# Altium PCB ALINX9226结构图.PcbDoc
Units mil, origin at the board's own origin, x right, y up, seen from the top; angles counter-clockwise.
Board outline 3191.61 x 2015 mil, 4 copper layers (TopLayer, D3V3, GND, BottomLayer); 3 components, 81 nets, 52 pads, 0 vias.
Unrouted connection lines stored in the file: 7.
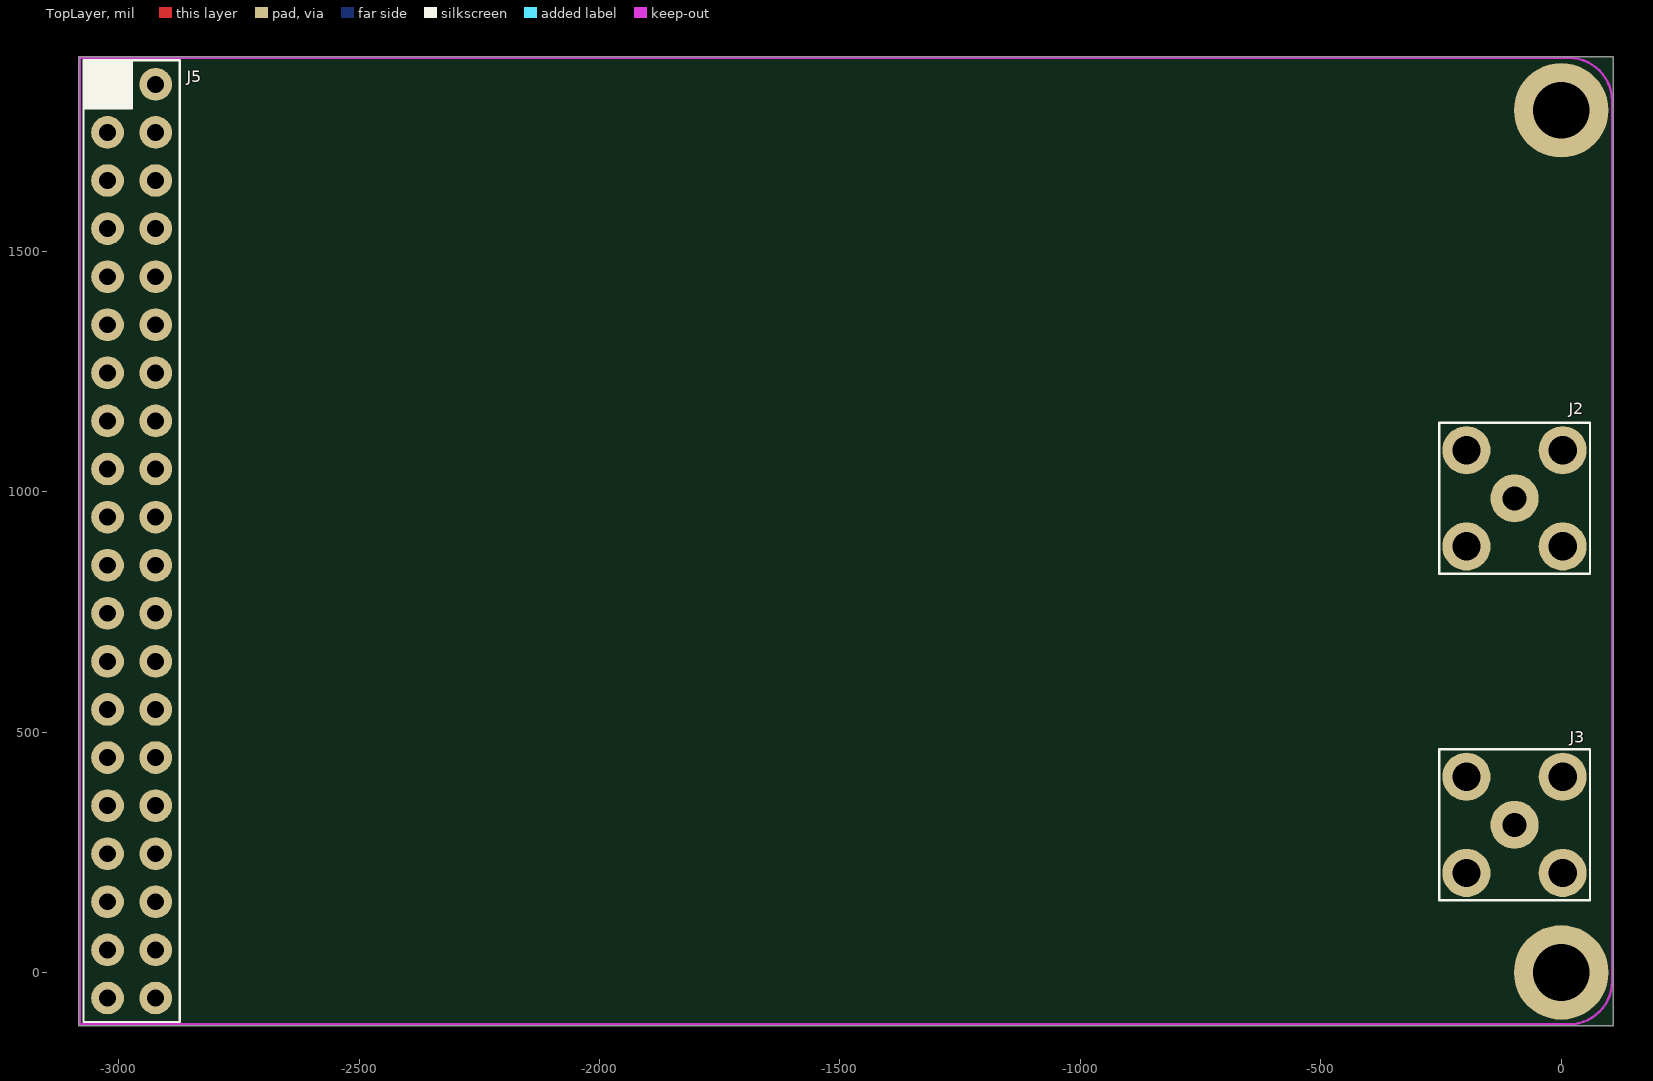
[diagram p0: TopLayer view]
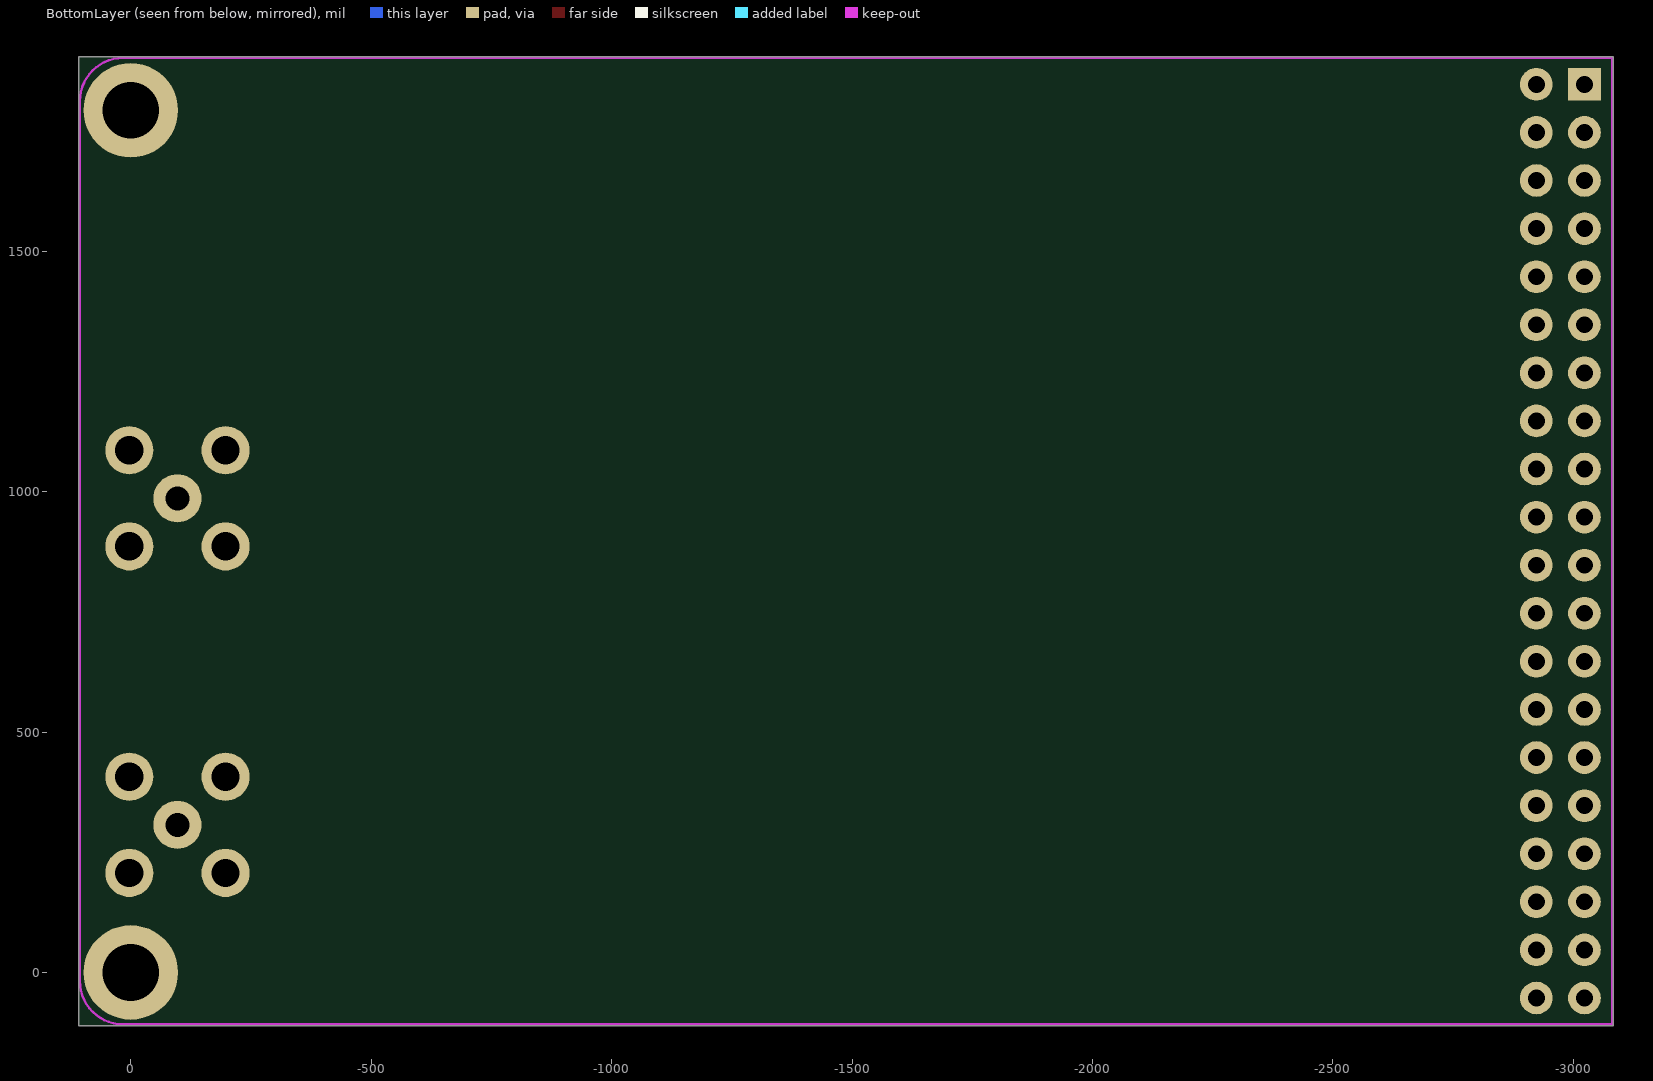
[diagram p1: BottomLayer view, seen from below]
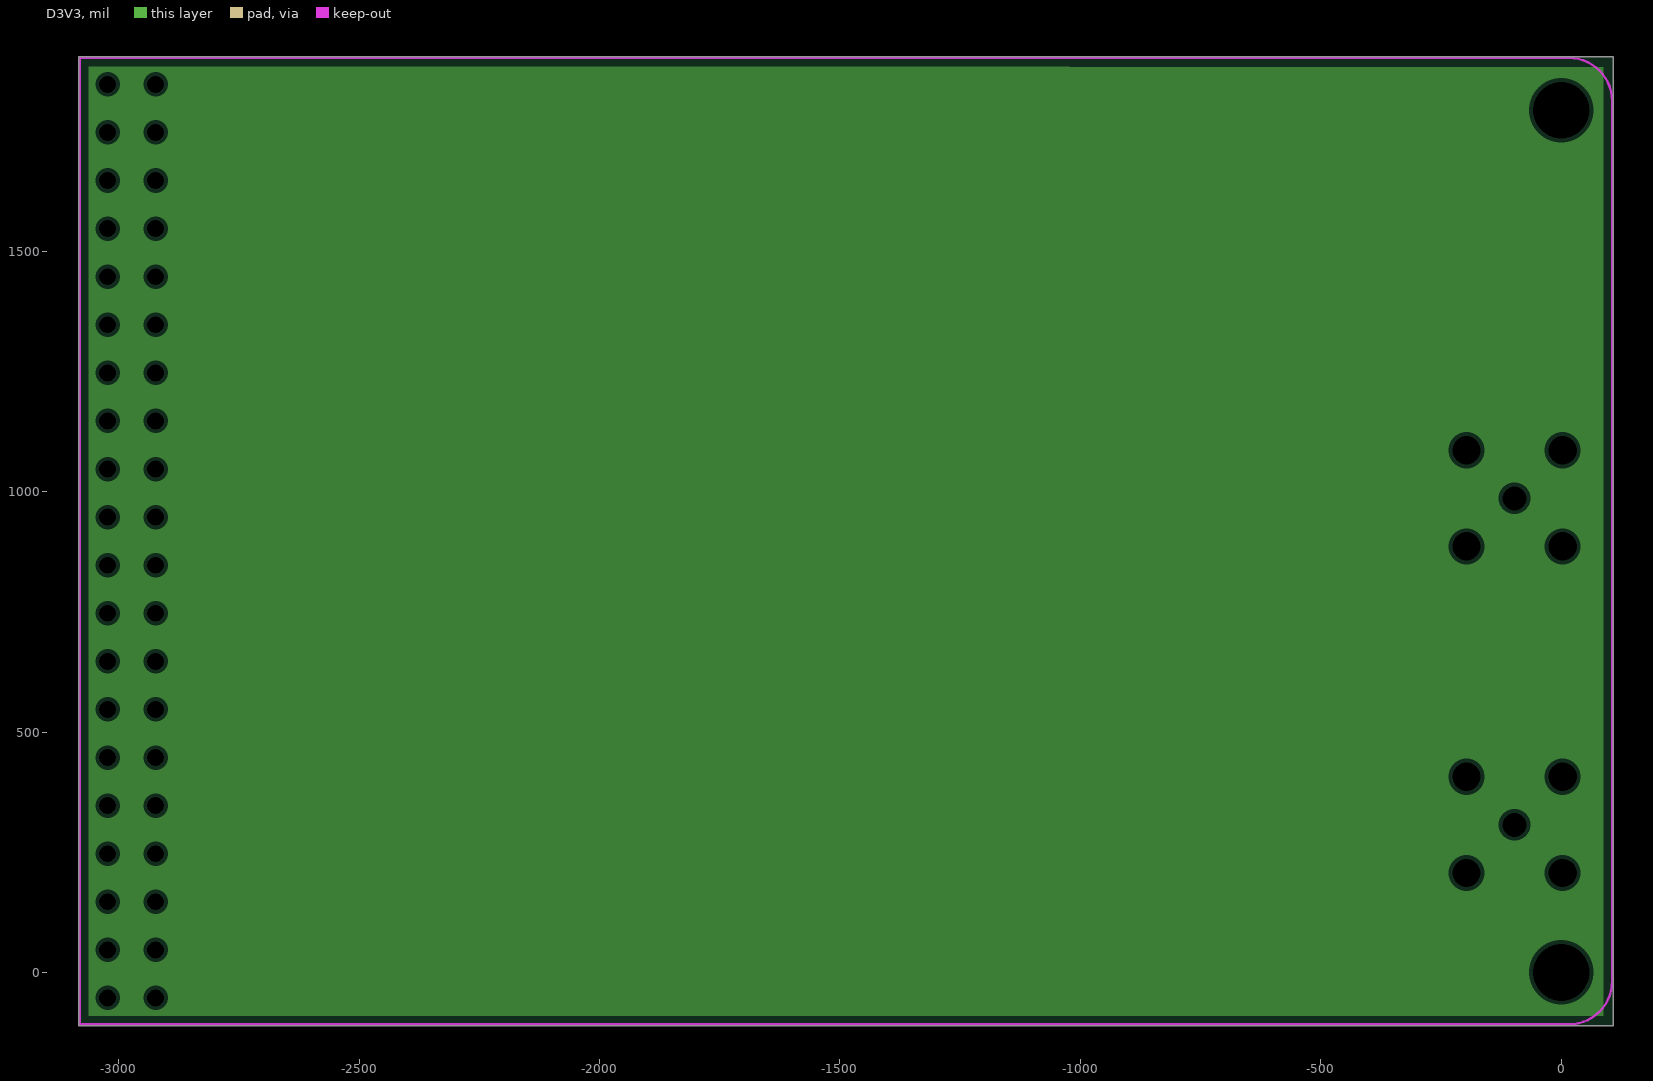
[diagram p2: D3V3, clearances drawn from the general rule]
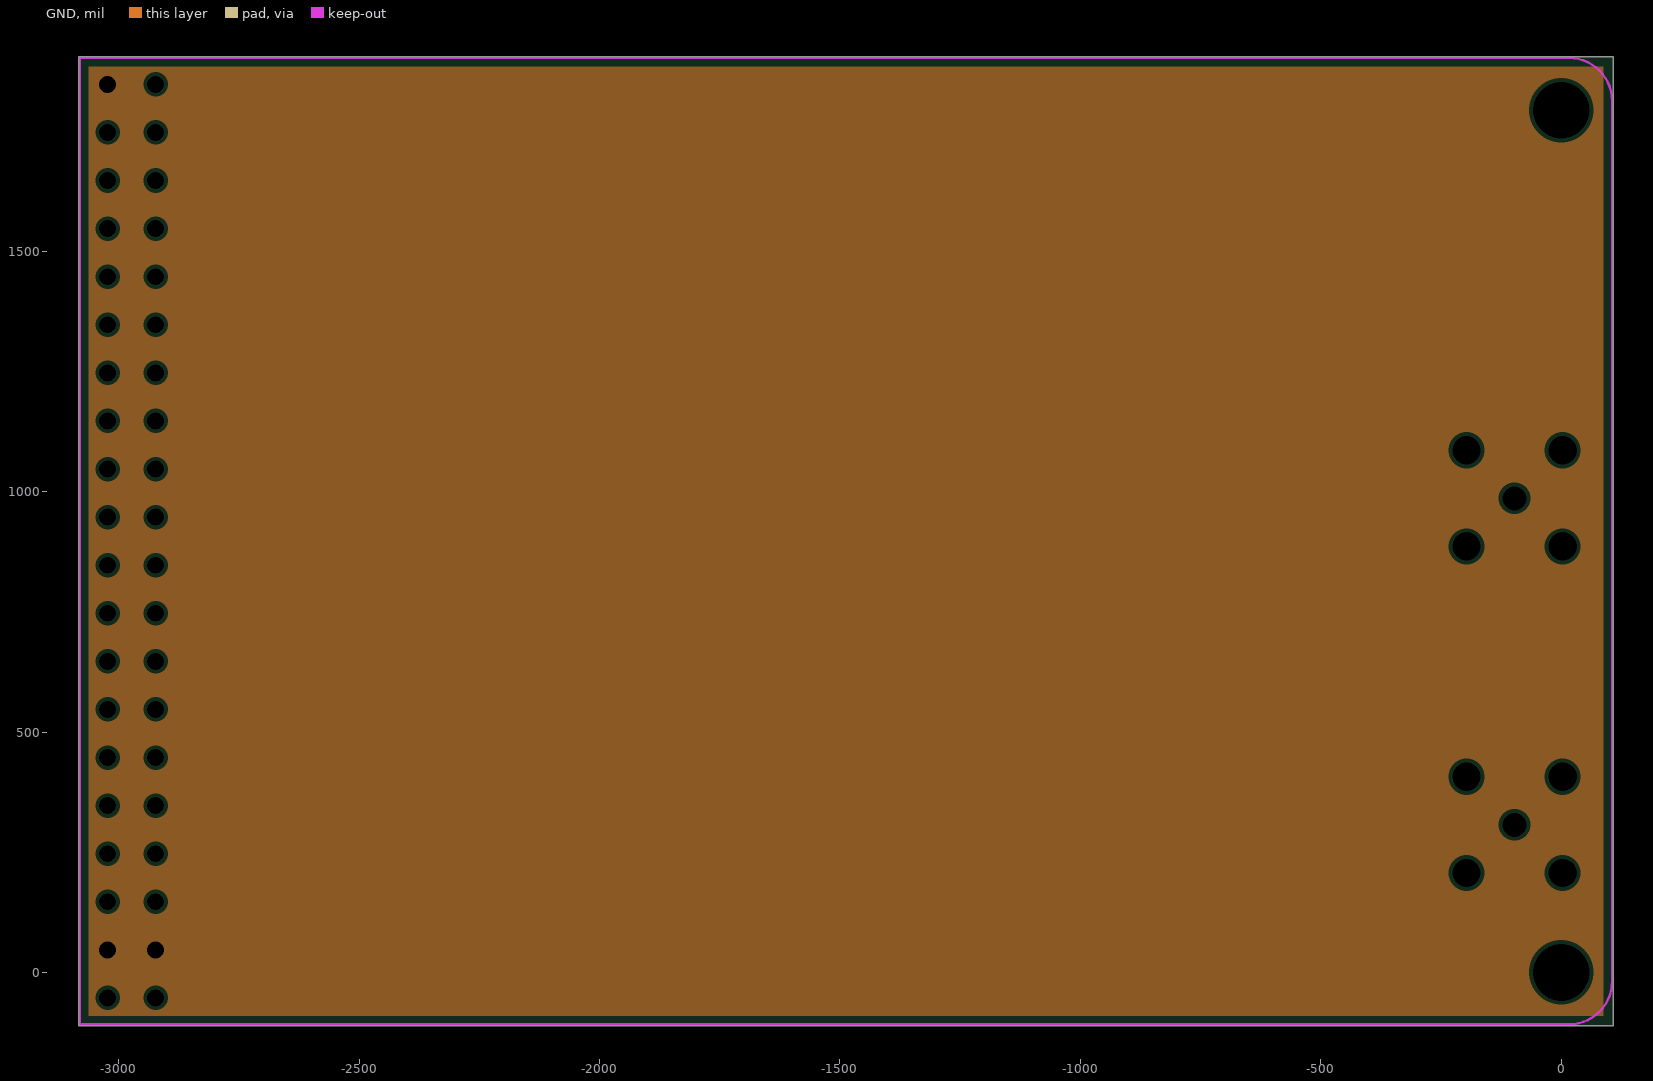
[diagram p3: GND, clearances drawn from the general rule]

## Layer stack, top to bottom
TopLayer: signal copper 1.4
Dielectric: core 12.6, FR-4, Dk 4.8
D3V3: plane copper 1.4, net (Multiple Nets)
Dielectric: prepreg 12.6, FR-4, Dk 4.8
GND: plane copper 1.4, net (Multiple Nets)
Dielectric: core 12.6, FR-4, Dk 4.8
BottomLayer: signal copper 1.4

## Board outline
-3083.11,-110.4 108.5,-110.4 108.5,1904.6 -3083.11,1904.6

## Design rules (kind name [scope] priority, off if disabled: settings)
Clearance [All] p1: gap=8
FabricationTestPointUsage TestPointUsage [All] p1: valid=0 allowmultiple=FALSE
FabricationTestpoint Testpoint [All] p1: side=3 testpointundercomponent=TRUE minsize=40 maxsize=100 preferedsize=60 minholesize=20 maxholesize=40 preferedholesize=32 testpointgrid=1 allowsidetop=TRUE allowsidebottom=TRUE usegrid=TRUE gridtolerance=0.01
HoleSize [All] p1: absolutevalues=TRUE maxlimit=200 minlimit=1 maxpercent=80.000 minpercent=20.000
PlaneClearance [All] p1: clearance=8
PlaneConnect [All] p1: planeconnectstyle=Relief reliefexpansion=6 reliefentries=4 reliefconductorwidth=6 reliefairgap=5
PolygonConnect [All] p1: connectstyle=Relief reliefconductorwidth=10 reliefentries=4 polygonreliefangle="90 Angle"
RoutingVias [All] p1: holewidth=20 width=40 viastyle="Through Hole" minholewidth=15 minwidth=30 maxholewidth=50 maxwidth=100
SilkscreenOverComponentPads [All] p1: minsilkscreentomaskgap=10
SolderMaskExpansion [All] p1: expansion=4
Width [All] p1: maxlimit=60 minlimit=5 preferedwidth=40
22 further rules are at their usual default settings.

## Components (designator, comment, footprint, x,y, rotation, side; value= is the part's Value field where it differs from the comment)
J2 "ADCIN1" BNC_3 -97,986 r90 top
J3 "ADCIN2" BNC_3 -97,307 r90 top
J5 "IDC40" IDC40 -3023,1847 r270 top

## Footprints (in the part's own frame and the unit in brackets; to place one, negate y for a bottom-side part, rotate by r counter-clockwise, add the part's x,y. Pads: shape width x height; smd on the part's side, far side on the other; paste and mask are expansions set on the pad)
BNC_3 [mm]
  round 2.54 hole 1.27: 1(0,0)
  round 2.54 hole 1.5: 2(-2.54,-2.54) 2(-2.54,2.54) 2(2.54,-2.54) 2(2.54,2.54)
  silkscreen extent -3.99,-3.99 3.99,3.99
IDC40 [mil]
  rect 68x68 hole 35: 1(0,0)
  round 68 hole 35: 2(0,100) 3(100,0) 4(100,100) 5(200,0) 6(200,100) 7(300,0) 8(300,100) 9(400,0) 10(400,100) 11(500,0) 12(500,100) 13(600,0) 14(600,100) 15(700,0) 16(700,100) 17(800,0) 18(800,100) 19(900,0) 20(900,100) 21(1000,0) 22(1000,100) 23(1100,0) 24(1100,100) 25(1200,0) 26(1200,100) 27(1300,0) 28(1300,100) 29(1400,0) 30(1400,100) 31(1500,0) 32(1500,100) 33(1600,0) 34(1600,100) 35(1700,0) 36(1700,100) 37(1800,0) 38(1800,100) 39(1900,0) 40(1900,100)
  silkscreen extent -50,-50 1950,150

## Free pads (board coordinates)
  round 196.85 hole 118.11: 1(0,0) 2(0,1793)

## Nets (pads, with @x,y where several pads share a name; then routed paths per layer and width w, separated by ;. In a path a pad name is that pad's centre, name@x,y a point inside that pad or via, vN(x,y) a via of type N, cw(c..) or ccw(c..) an arc to the next point about the centre after c; other vN are vias at no path point)
+5V: 
+5VA: 
+5VB: 
-5V: 
-5VA: 
-5VB: 
AD1_OTR: J5.15
AD1CLK: J5.4
AD1DB0: J5.16
AD1DB1: J5.13
AD1DB2: J5.14
AD1DB3: J5.11
AD1DB4: J5.12
AD1DB5: J5.9
AD1DB6: J5.10
AD1DB7: J5.7
AD1DB8: J5.8
AD1DB9: J5.5
AD1DB10: J5.6
AD1DB11: J5.3
AD2_OTR: J5.29
AD2CLK: J5.18
AD2DB0: J5.30
AD2DB1: J5.27
AD2DB2: J5.28
AD2DB3: J5.25
AD2DB4: J5.26
AD2DB5: J5.23
AD2DB6: J5.24
AD2DB7: J5.21
AD2DB8: J5.22
AD2DB9: J5.19
AD2DB10: J5.20
AD2DB11: J5.17
ADIN1: 
ADIN2: 
AGND0: 
AGND1: J2.2
AGND2: J3.2
AIN1: 
AIN2: 
D3V3: 
D3V3A: J5.39 J5.40
GND: J5.1 J5.37 J5.38
N16213017: 
N16213301: 
N16213337: 
N16213393: 
N16213429: 
N16224615: 
N16224700: 
N16224819: 
N16225671: 
N16356819: 
N16356841: 
N16365064: 
N16365120: 
N16365174: 
N16365270: 
N16365640: 
N16365660: 
N16380312: J5.32
N16380334: J5.31
N16380338: J5.33
N16380342: J5.34
N16380346: J5.35
N16380350: J5.36
N16381253: 
N16394429: J3.1
N16394924: J2.1
N16411987: 
N16412048: 
N16413321: 
N16413593: 
N1622282215: 
N1640152915: 
NREF1: 
NREF2: 
VCC: J5.2
VREF1: 
VREF2: 

## Polygon pours and split planes (outlines as drawn)
D3V3 on D3V3 (split plane): -1023.78,1884.45 -1021.96,1883.69 -1020,1883.44 88.4,1883.44 88.4,-90.3 -3063.01,-90.3 -3063.01,1884.51 -1023.86,1884.51
GND on GND (split plane): 88.4,-90.3 -3063.01,-90.3 -3063.01,1884.51 88.4,1884.51

## Keep-outs
KeepOutLayer:
  lines w5: -3080.61,1809 -3080.61,1902.1 -2989.11,1902.1 ; -3080.61,1812.1 -3080.61,-17.9 -3080.61,-107.9 -2990.61,-107.9 8.1,-107.9 16,-107.9 ccw(c16,-17.9) 106,-17.9 ; -2990.61,1902.1 -2987.61,1902.1 -2954.61,1902.1 ; -2954.9,1902.1 16,1902.1 cw(c16,1812.1) 106,1812.1 106,-17.5

## Other copper
D3V3 (plane layer: these items are gaps in the copper):
  lines w15: -1521,-101 102,-101 102,1891 -1020,1891
GND (plane layer: these items are gaps in the copper):
  lines w15: -1524,-112 98,-112 98,1895 -1020,1895
  lines w18: -1524,-112 108.5,-112 108.5,652 ; -1034,1903 108.5,1903 108.5,1269 ; 104,656 104,1269

## Silkscreen, mask and mechanical layers (free items; w line width, h text height)
TopOverlay:
  rectangle: -3073,1796 -2972,1897

## Dimensions
-3080.61,-107.9 to 106,-17.5 on DrillDrawing
-3080.61,1902.1 to -3080.61,-107.9 on DrillDrawing